# Altium PCB shield.PcbDoc
Units mm, origin at the board's own origin, x right, y up, seen from the top; angles counter-clockwise.
Board outline 78.89 x 114.25 mm, 2 copper layers (Top Layer, Bottom Layer); 72 components, 147 nets, 454 pads, 290 vias.
Unrouted connection lines stored in the file: 4.
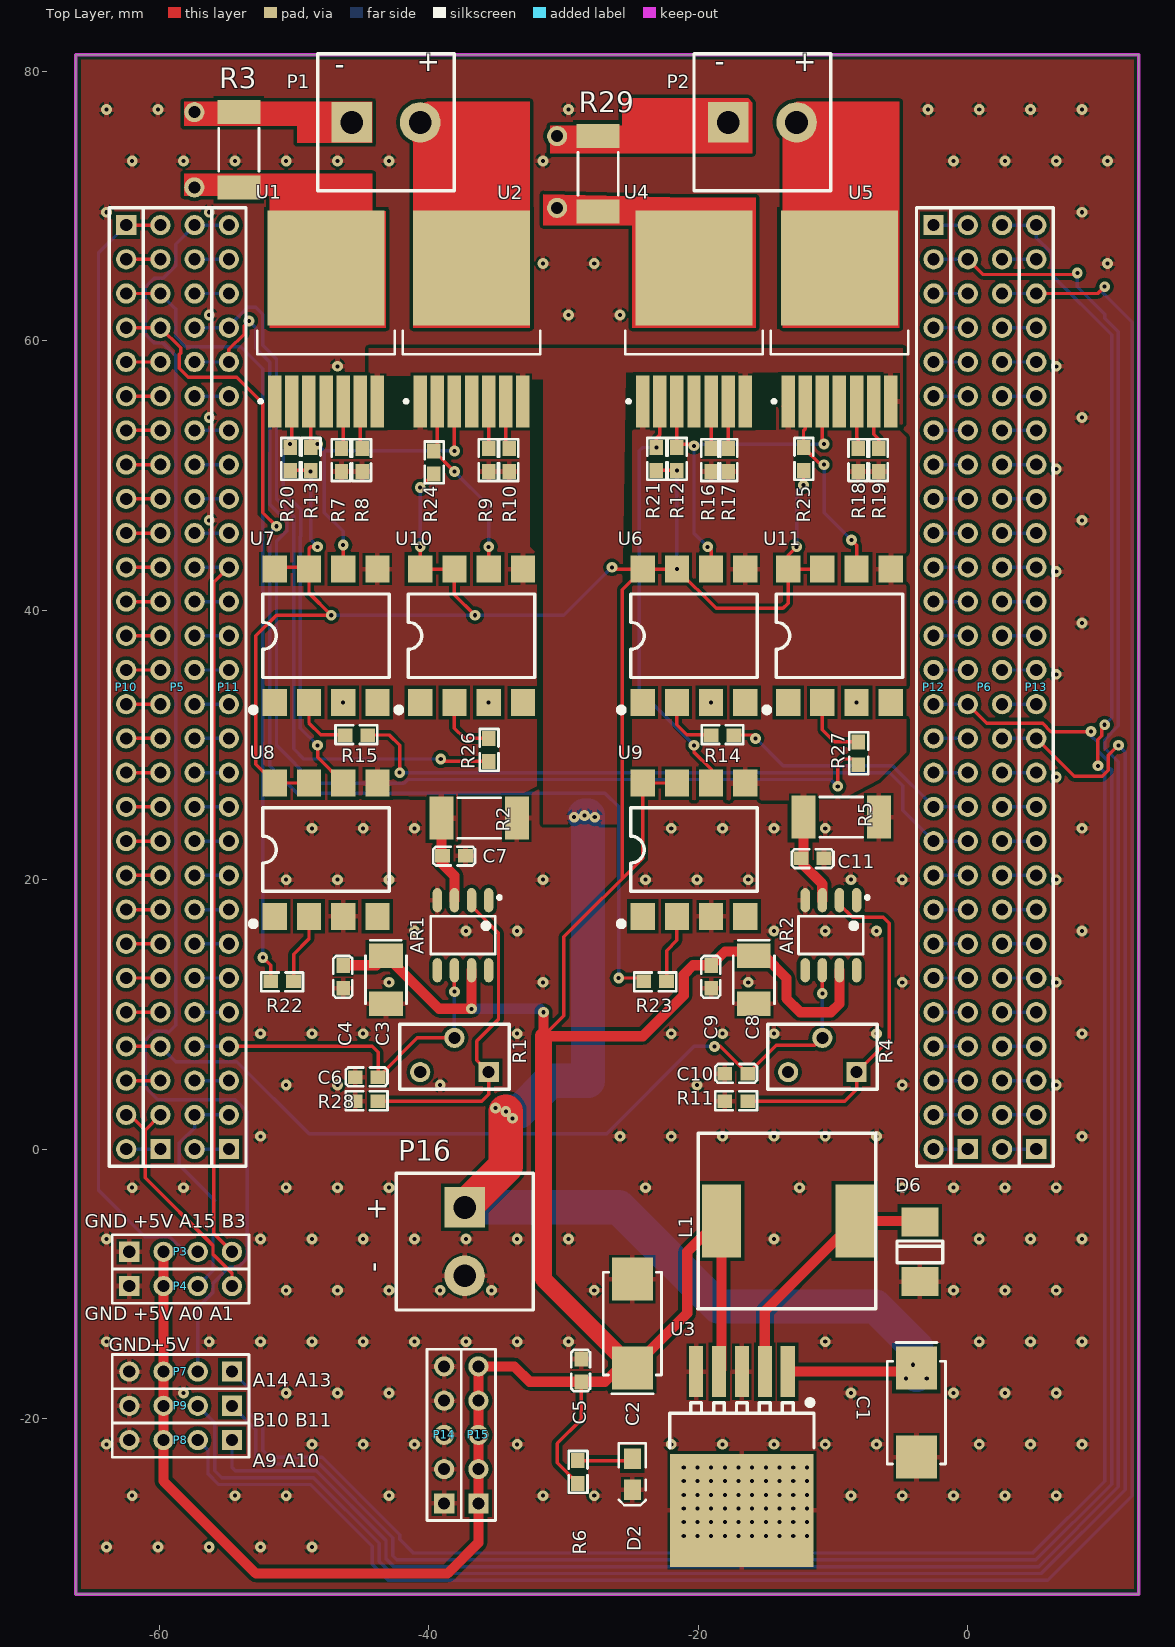
[diagram p0: Top Layer view]
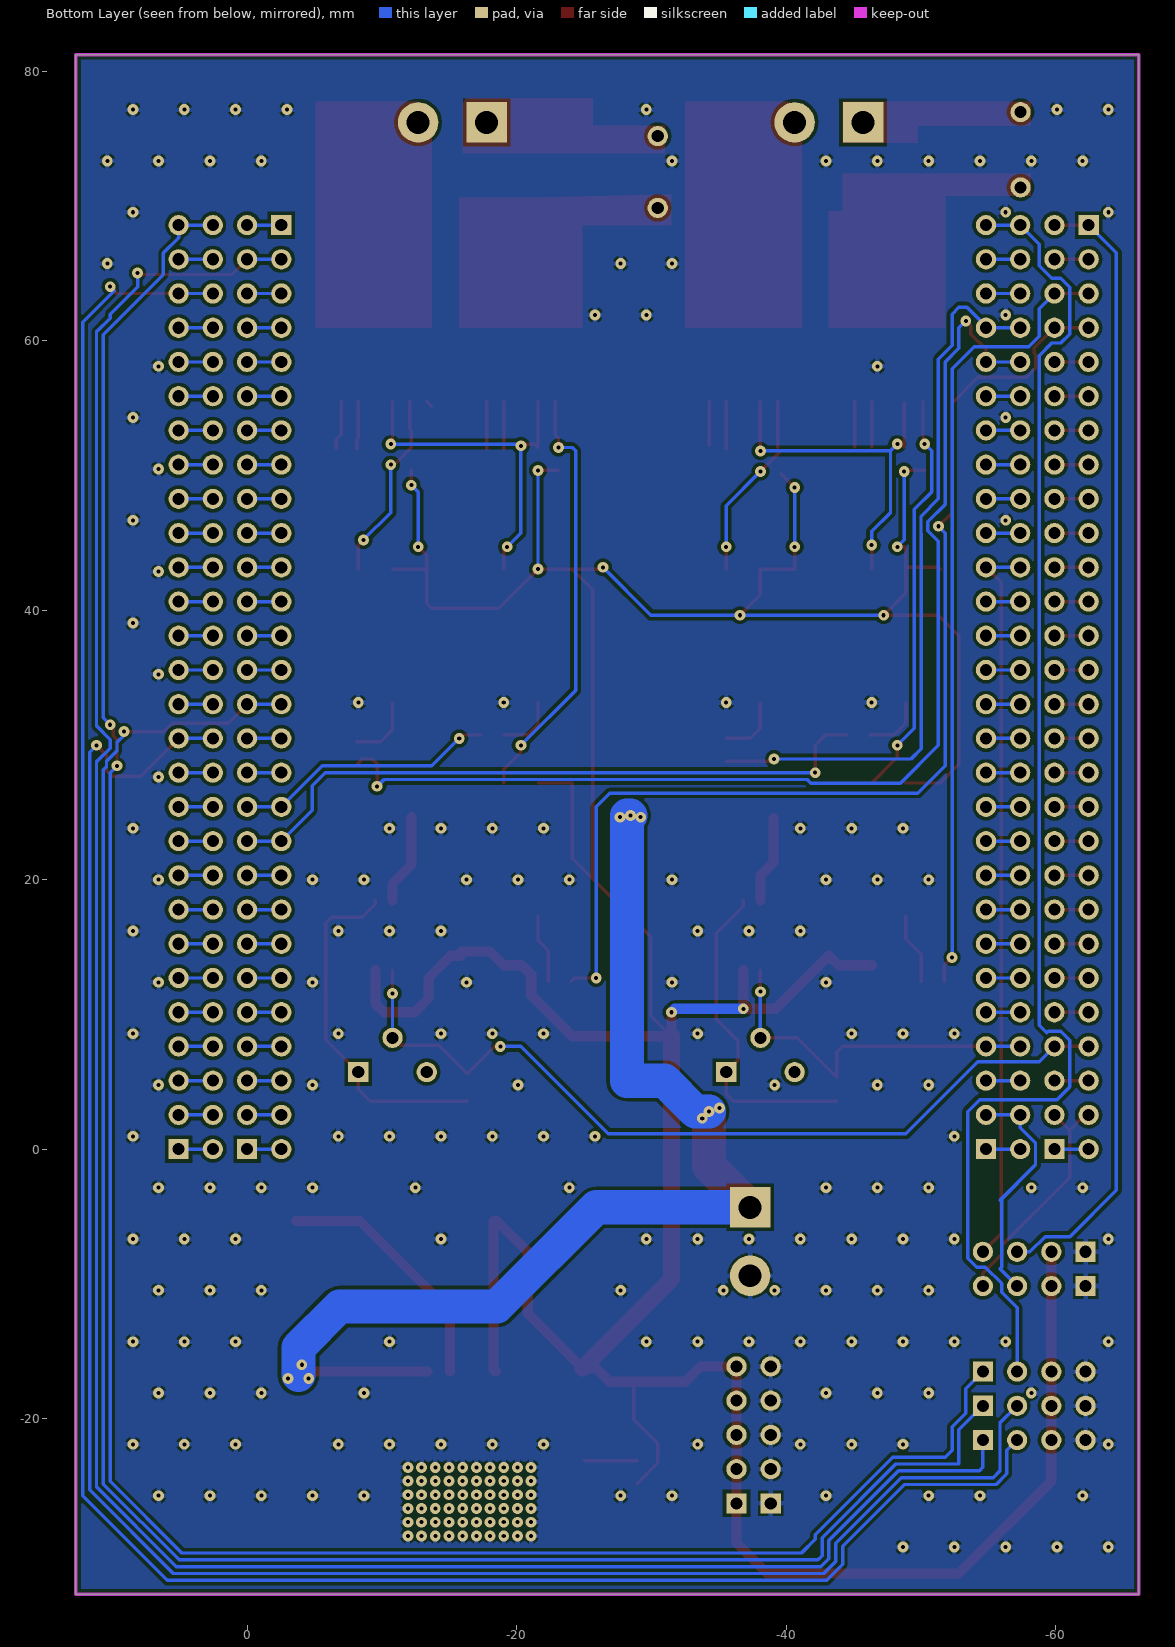
[diagram p1: Bottom Layer view, seen from below]

## Layer stack, top to bottom
Top Solder: solder mask 0.0102, Solder Resist, Dk 3.5
Top Layer: signal copper 0.0356
Dielectric 1: dielectric 0.32, FR-4, Dk 4.8
Bottom Layer: signal copper 0.0356
Bottom Solder: solder mask 0.0102, Solder Resist, Dk 3.5

## Board outline
-66.19,-33.02 12.7,-33.02 12.7,81.23 -66.19,81.23

## Design rules (kind name [scope] priority, off if disabled: settings)
Clearance [All] p1: gap=0.254
ComponentClearance [All] p1 off: gap=0.254 collisioncheckmode=3 verticalgap=0.254 showdistances=FALSE
HoleSize [All] p1: absolutevalues=TRUE maxlimit=10 minlimit=0.3 maxpercent=80.000 minpercent=20.000
MinimumSolderMaskSliver [All] p1 off: minsoldermaskwidth=0.254
PasteMaskExpansion [All] p1 off: expansion=0
PolygonConnect [All] p1: connectstyle=Relief reliefconductorwidth=0.381 reliefentries=4 polygonreliefangle="90 Angle" airgapwidth=0.178
RoutingVias [All] p1: holewidth=0.3 width=0.8 viastyle="Through Hole" minholewidth=0.3 minwidth=0.8 maxholewidth=5 maxwidth=5
SilkToSilkClearance [All] p1 off: silktosilkclearance=0.254
SilkToSolderMaskClearance [IsPad] p1 off: minsilkscreentomaskgap=0.254 clearancetoexposedcopper=TRUE
SolderMaskExpansion [All] p1 off: expansion=0.102
Width [All] p1: maxlimit=12.7 minlimit=0.254 preferedwidth=0.254
24 further rules are at their usual default settings.

## Components (designator, comment, footprint, x,y, rotation, side; value= is the part's Value field where it differs from the comment)
AR1 "OPAMP" LC-SO-8_3.9mm -37.465,15.875 r180 top
AR2 "OPAMP" LC-SO-8_3.9mm -10.16,15.875 r180 top
C1 "Cap" CAP-7343 -3.81,-19.558 r270 top
C2 "Cap" CAP-7343 -24.892,-12.954 r90 top
C3 "Cap Pol1" CAP-3528 -43.18,12.573 r270 top
C4 "Cap" CAP-0603 -46.355,11.938 r90 top
C5 "cap smd" CAP-0603 -28.702,-17.272 r90 top
C6 "Cap" CAP-0603 -45.466,5.334 r0 top
C7 "Cap" CAP-0603 -37.28,21.78 r180 top
C8 "Cap Pol1" CAP-3528 -15.875,12.573 r270 top
C9 "Cap" CAP-0603 -19.05,11.938 r90 top
C10 "Cap" CAP-0603 -18.034,5.588 r0 top
C11 "Cap" CAP-0603 -10.668,21.59 r180 top
D2 "LED2" D2012[0805] -24.892,-24.13 r270 top
D6 "SS34" LC-SMB(DO-214AA)_S3 -3.556,-7.62 r270 top
L1 "Inductor" Inductor1207 -8.382,-5.334 r180 top
P1 "2_Pins_Port" WJ2EDGV-5.08-2P -45.72,76.2 r0 top
P2 "2_Pins_Port" WJ2EDGV-5.08-2P -17.78,76.2 r0 top
P3 "Header 4" HDR1X4 -62.23,-7.62 r0 top
P4 "Header 4" HDR1X4 -62.23,-10.16 r0 top
P5 "Header28*2" HDR28*2 -59.92,0 r0 top locked
P6 "Header28*2" HDR28*2 0,0 r0 top locked
P7 "Header 4" HDR1X4 -54.61,-16.51 r180 top
P8 "Header 4" HDR1X4 -54.61,-21.59 r180 top
P9 "Header 4" HDR1X4 -54.61,-19.05 r180 top
P10 "Header28" HDR28 -62.46,68.58 r180 top
P11 "Header28" HDR28 -54.84,0 r0 top
P12 "Header28" HDR28 -2.54,68.58 r180 top
P13 "Header28" HDR28 5.08,0 r0 top
P14 "Header 5" HDR1X5 -38.862,-26.289 r90 top
P15 "Header 5" HDR1X5 -36.322,-26.289 r90 top
P16 "2_Pins_Port" WJ2EDGV-5.08-2P -37.338,-4.318 r270 top
R1 "Res Adj1" 3266W -35.56,5.715 r180 top
R2 "sampling" 6332[2512] -36.264,24.574 r180 top
R3 "sampling" 6332[2512] -54.102,74.168 r270 top
R4 "Res Adj1" 3266W -8.255,5.715 r180 top
R5 "sampling" 6332[2512] -9.398,24.638 r180 top
R6 "RES1" RES-0603 -28.956,-23.114 r270 top
R7 "10K" RES-0603 -46.482,50.292 r90 top
R8 "10K" RES-0603 -44.958,50.292 r90 top
R9 "10K" RES-0603 -35.56,50.292 r90 top
R10 "10K" RES-0603 -34.036,50.292 r90 top
R11 "Res1" RES-0603 -18.034,3.556 r0 top
R12 "Res1" RES-0603 -21.59,52.07 r270 top
R13 "Res1" RES-0603 -48.768,52.07 r270 top
R14 "Res1" RES-0603 -19.05,30.734 r0 top
R15 "Res1" RES-0603 -46.228,30.734 r0 top
R16 "10K" RES-0603 -19.05,50.292 r90 top
R17 "10K" RES-0603 -17.78,50.292 r90 top
R18 "10K" RES-0603 -8.128,50.292 r90 top
R19 "10K" RES-0603 -6.604,50.292 r90 top
R20 "Res1" RES-0603 -50.292,52.07 r270 top
R21 "Res1" RES-0603 -23.114,52.07 r270 top
R22 "Res1" RES-0603 -50.038,12.446 r180 top
R23 "Res1" RES-0603 -22.352,12.446 r180 top
R24 "Res1" RES-0603 -39.624,51.816 r270 top
R25 "Res1" RES-0603 -12.192,52.07 r270 top
R26 "Res1" RES-0603 -35.56,30.48 r270 top
R27 "Res1" RES-0603 -8.128,30.226 r270 top
R28 "Res1" RES-0603 -45.466,3.556 r0 top
R29 "sampling" 6332[2512] -27.432,72.39 r270 top
U1 "BTN7970" BTN7970 -47.625,61.595 r90 top
U2 "BTN7970" BTN7970 -36.83,61.595 r90 top
U3 "LM2596" LC-TO-263-5 -16.764,-16.51 r90 top
U4 "BTN7970" BTN7970 -20.32,61.595 r90 top
U5 "BTN7970" BTN7970 -9.525,61.595 r90 top
U6 "6n137" LC-SMD-8_6.3mm -20.32,38.1 r0 top
U7 "6n137" LC-SMD-8_6.3mm -47.625,38.1 r0 top
U8 "6n137" LC-SMD-8_6.3mm -47.625,22.225 r0 top
U9 "6n137" LC-SMD-8_6.3mm -20.32,22.225 r0 top
U10 "6n137" LC-SMD-8_6.3mm -36.83,38.1 r0 top
U11 "6n137" LC-SMD-8_6.3mm -9.525,38.1 r0 top

## Footprints (in the part's own frame and the unit in brackets; to place one, negate y for a bottom-side part, rotate by r counter-clockwise, add the part's x,y. Pads: shape width x height; smd on the part's side, far side on the other; paste and mask are expansions set on the pad)
3266W [mm]
  rect 1.5x1.5 hole 0.9: 1(0,0)
  round 1.5 hole 0.9: 2(2.54,-2.54) 3(5.08,0)
  silkscreen extent -1.52,-3.56 6.6,1.27
6332[2512] [mm] "Chip Resistor; Body 6.3 x 3.2 mm (LxW typ)"
  rect 1.8x3.2 smd: 1(-2.8,0) 2(2.8,0)
  silkscreen extent -1.6,-1.5 1.6,1.5
BTN7970 [mm] "D2-PAK, 8-Pads, Body 7.82x8.46mm (max), IPC Medium Density"
  rect 3.85x1 smd paste-0.1: 1(-6.1,3.81) 2(-6.1,2.54) 3(-6.1,1.27) 4(-6.1,0) 5(-6.1,-1.27) 6(-6.1,-2.54) 7(-6.1,-3.81)
  rect 8.5x8.7 smd paste-1: 4(3.8,0)
  silkscreen extent -6.22,-5.1 -0.85,5.1, body extent -2.6,-5.1 6.85,5.1, height 4.4
CAP-0603 [mm]
  rect 1.1x1 smd: 1(0,0) 2(1.7,0)
  silkscreen extent -0.71,-0.67 2.39,0.73
CAP-3528 [mm] "钽电容"
  rect 1.8x2.5 smd: 1(-1.778,0) 2(1.778,0)
  silkscreen extent -2.92,-1.52 1.78,1.52, body extent -1.91,-1.4 1.91,1.4, height 1.1
CAP-7343 [mm] "钽电容"
  rect 3.2x3.05 smd: 1(-3.302,0) 2(3.302,0)
  silkscreen extent -5.21,-2.16 3.81,2.16, body extent -3.68,-1.91 3.68,1.91, height 2.95
D2012[0805] [mil]
  rect 60x50 smd: 1(-45,0) 2(45,0)
  silkscreen extent -91,-39 91,39, body extent -39,-24 39,24, height 47
HDR1X4 [mm] "Connector; Header; 4 Position"
  rect 1.5x1.5 hole 0.9: 1(0,0)
  round 1.5 hole 0.9: 2(2.54,0) 3(5.08,0) 4(7.62,0)
  silkscreen extent -1.27,-1.27 8.89,1.27
HDR1X5 [mm] "Connector; Header; 5 Position"
  rect 1.5x1.5 hole 0.9: 1(0,0)
  round 1.5 hole 0.9: 2(2.54,0) 3(5.08,0) 4(7.62,0) 5(10.16,0)
  silkscreen extent -1.27,-1.27 11.43,1.27
HDR28 [mm]
  rect 1.5x1.5 hole 0.9: 1(0,0)
  round 1.5 hole 0.9: 2(0,2.54) 3(0,5.08) 4(0,7.62) 5(0,10.16) 6(0,12.7) 7(0,15.24) 8(0,17.78) 9(0,20.32) 10(0,22.86) 11(0,25.4) 12(0,27.94) 13(0,30.48) 14(0,33.02) 15(0,35.56) 16(0,38.1) 17(0,40.64) 18(0,43.18) 19(0,45.72) 20(0,48.26) 21(0,50.8) 22(0,53.34) 23(0,55.88) 24(0,58.42) 25(0,60.96) 26(0,63.5) 27(0,66.04) 28(0,68.58)
  silkscreen extent -1.27,-1.27 1.27,69.85
HDR28*2 [mm]
  rect 1.5x1.5 hole 0.9: 1(0,0)
  round 1.5 hole 0.9: 2(0,2.54) 3(0,5.08) 4(0,7.62) 5(0,10.16) 6(0,12.7) 7(0,15.24) 8(0,17.78) 9(0,20.32) 10(0,22.86) 11(0,25.4) 12(0,27.94) 13(0,30.48) 14(0,33.02) 15(0,35.56) 16(0,38.1) 17(0,40.64) 18(0,43.18) 19(0,45.72) 20(0,48.26) 21(0,50.8) 22(0,53.34) 23(0,55.88) 24(0,58.42) 25(0,60.96) 26(0,63.5) 27(0,66.04) 28(0,68.58) 29(2.54,68.58) 30(2.54,66.04) 31(2.54,63.5) 32(2.54,60.96) 33(2.54,58.42) 34(2.54,55.88) 35(2.54,53.34) 36(2.54,50.8) 37(2.54,48.26) 38(2.54,45.72) 39(2.54,43.18) 40(2.54,40.64) 41(2.54,38.1) 42(2.54,35.56) 43(2.54,33.02) 44(2.54,30.48) 45(2.54,27.94) 46(2.54,25.4) 47(2.54,22.86) 48(2.54,20.32) 49(2.54,17.78) 50(2.54,15.24) 51(2.54,12.7) 52(2.54,10.16) 53(2.54,7.62) 54(2.54,5.08) 55(2.54,2.54) 56(2.54,0)
  silkscreen extent -1.27,-1.27 3.81,69.85
Inductor1207 [mm] "Inductor1207"
  rect 2.9x5.4 smd: 1(0,0) 2(9.9,0)
  silkscreen extent -1.55,-6.5 11.66,6.5
LC-SMB(DO-214AA)_S3 [mm]
  rect 2.159x2.743 smd: 1(2.21,0) 2(-2.21,0)
  silkscreen extent -0.8,-1.7 0.8,1.7
LC-SMD-8_6.3mm [mm]
  rect 1.8x2 smd: 1(-3.81,-4.95) 2(-1.27,-4.95) 3(1.27,-4.95) 4(3.81,-4.95) 5(3.81,4.95) 6(1.27,4.95) 7(-1.27,4.95) 8(-3.81,4.95)
  silkscreen extent -5.6,-5.7 4.7,3.1
LC-SO-8_3.9mm [mm]
  oval 0.7x1.8 smd: 1(-1.905,-2.6) 2(-0.635,-2.6) 3(0.635,-2.6) 4(1.905,-2.6) 5(1.905,2.6) 6(0.635,2.6) 7(-0.635,2.6) 8(-1.905,2.6)
  silkscreen extent -2.83,-2.92 2.4,1.4
LC-TO-263-5 [mm]
  rect 8.4x10.65 smd: 0(-10.3,0)
  rect 3.8x1.05 smd: 1(0,-3.4) 2(0,-1.7) 3(0,0) 4(0,1.7) 5(0,3.4)
  silkscreen extent -5.65,-5.35 -2.1,5.35
RES-0603 [mm] "1/10W"
  rect 1.1x1 smd: 1(0,0) 2(1.7,0)
  silkscreen extent -0.71,-0.67 2.39,0.73
WJ2EDGV-5.08-2P [mm]
  rect 3x3 hole 1.7: 1(0,0)
  round 3 hole 1.7: 2(5.08,0)
  silkscreen extent -2.54,-5.08 7.62,5.08

## Part data
AR1 AR2: "Operational Amplifier"
C1 C2: library part "Cap Pol S", "贴片极性电容"
C3 C8: "Polarized Capacitor (Radial)"
C4 C6 C7 C9 C10 C11: "Capacitor"
C5: library part CAP, "贴片无极性电容"
D2: "Typical RED, GREEN, YELLOW, AMBER GaAs LED"
D6: library part "Diode 1N5400", "3 Amp General Purpose Rectifier"
P3 P4 P7 P8 P9: "Header, 4-Pin"
P5 P6: library part header28*2
P14 P15: "Header, 5-Pin"
R1 R4: "Variable Resistor"
R2 R3 R5 R29: library part Res3, "Resistor"
R7 R8 R9 R10 R16 R17 R18 R19: library part res1, "Resistor"
R11 R12 R13 R14 R15 R20 R21 R22 R23 R24 R25 R26 R27 R28: "Resistor"

## Free pads (board coordinates)
  round 1.5 hole 0.9 mask+0.04: 4(-57.404,76.962) 5(-57.404,71.374) 6(-30.48,75.184) 7(-30.48,69.85)

## Via types
v1: diameter 0.8, hole 0.3, Top Layer to Bottom Layer, 290 vias

## Nets (pads, with @x,y where several pads share a name; then routed paths per layer and width w, separated by ;. In a path a pad name is that pad's centre, name@x,y a point inside that pad or via, vN(x,y) a via of type N, cw(c..) or ccw(c..) an arc to the next point about the centre after c; other vN are vias at no path point)
A0: P4.3 P5.55 P11.2 | length 17.5
  Bottom Layer w0.254: P4.3 -55.88,-8.89 -56.019,-8.751 -56.019,-3.81 -55.88,-3.81 -58.511,-1.179 -58.511,0.468 -57.38,1.599 P5.55 P11.2
A1: P4.4 P5.2 P10.27 | length 17.7
  Top Layer w0.254: P10.27 -62.182,2.54 -61.051,1.409 ; P5.2 -61.051,1.409 ; P4.4 -54.61,-9.219 -56.019,-7.81 -56.019,-7.152 -61.051,-2.12 -61.051,1.409
A2: P5.56 P11.1 | length 2.5
  Bottom Layer w0.254: P5.56 P11.1
A3: P5.1 P10.28 | length 2.5
  Bottom Layer w0.254: P10.28 P5.1
A4: P6.1 P12.28 | length 2.5
  Bottom Layer w0.254: P12.28 P6.1
A5: P6.56 P13.1 | length 2.5
  Bottom Layer w0.254: P6.56 P13.1
A6: P6.2 P12.27 | length 2.5
  Bottom Layer w0.254: P12.27 P6.2
A7: P6.55 P13.2 | length 2.5
  Bottom Layer w0.254: P6.55 P13.2
A8: P6.26 P12.3 | length 2.5
  Bottom Layer w0.254: P12.3 P6.26
A9: P6.31 P8.2 P13.26 | length 176.7
  Top Layer w0.254: P13.26 9.652,63.5 v1(10.16,64.008)
  Bottom Layer w0.254: P8.2 -56.388,-22.352 -56.388,-24.086 -55.582,-24.892 -48.768,-24.892 -44.196,-29.464 -44.196,-30.814 -43.006,-32.004 5.922,-32.004 12.192,-25.734 12.192,61.381 9.862,63.71 v1(10.16,64.008) ; P6.31 P13.26
A10: P6.27 P8.1 P12.2 | length 177.5
  Top Layer w0.254: P6.27 1.131,64.909 8.013,64.909 v1(8.128,65.024)
  Bottom Layer w0.254: P8.1 -54.61,-23.622 -54.356,-23.876 -48.347,-23.876 -43.18,-29.043 -43.18,-30.393 -42.585,-30.988 5.254,-30.988 11.176,-25.066 11.176,28.747 10.16,29.763 10.16,30.391 11.176,31.407 11.176,60.662 10.16,61.678 10.16,61.976 8.128,64.008 v1(8.128,65.024) ; P12.2 P6.27
A11: P6.30 P13.27 | length 2.5
  Bottom Layer w0.254: P6.30 P13.27
A12: P6.28 P12.1 | length 2.5
  Bottom Layer w0.254: P12.1 P6.28
A13: P6.29 P7.1 P13.28 | length 173.5
  Top Layer w0.254: v1(9.652,28.448) 9.652,30.391 9.925,30.665 9.925,31.261 v1(10.16,31.496)
  Bottom Layer w0.254: P7.1 -53.34,-17.78 -53.34,-19.602 -52.324,-20.618 -52.324,-22.352 -51.816,-22.86 -47.926,-22.86 -42.164,-28.622 -42.164,-28.956 -41.148,-29.972 4.833,-29.972 10.16,-24.645 10.16,27.94 v1(9.652,28.448) ; P6.29 P13.28 5.08,67.639 6.211,66.508 6.211,64.909 10.668,60.452 10.668,32.004 v1(10.16,31.496)
A14: P5.29 P7.2 P11.28 | length 101
  Bottom Layer w0.254: P7.2 -57.15,-11.759 -56.019,-10.628 -56.019,-9.97 -54.8,-8.751 -54.142,-8.751 -53.479,-8.088 -53.479,2.778 -54.372,3.671 -60.11,3.671 -61.051,4.612 -61.051,8.088 -60.388,8.751 -59.452,8.751 -59.337,8.636 -58.789,9.184 -58.789,58.888 -59.73,59.829 -60.388,59.829 -61.051,60.492 -61.051,63.968 -60.388,64.631 -59.73,64.631 -58.789,65.572 -58.789,67.171 P5.29 P11.28
A15: P3.3 P5.28 P10.1 | length 84.3
  Top Layer w0.254: P10.1 P5.28
  Bottom Layer w0.254: P10.1 -64.516,66.524 -64.516,-3.048 -61.075,-6.489 -59.222,-6.489 -58.091,-7.62 P3.3
B0: P6.4 P12.25 | length 2.5
  Bottom Layer w0.254: P12.25 P6.4
B1: P6.53 P13.4 | length 2.5
  Bottom Layer w0.254: P6.53 P13.4
B2: P6.5 P12.24 | length 2.5
  Bottom Layer w0.254: P12.24 P6.5
B3: P3.4 P5.39 P11.18 | length 54.4
  Top Layer w0.254: P11.18 -54.864,43.18 -55.971,42.073 -55.971,-6.259 P3.4
  Bottom Layer w0.254: P5.39 P11.18
B4: P5.18 P10.11 | length 2.5
  Top Layer w0.254: P10.11 P5.18
B5: P5.40 P11.17 | length 2.5
  Bottom Layer w0.254: P5.40 P11.17
B6: P5.17 P10.12 | length 2.5
  Top Layer w0.254: P10.12 P5.17
B7: P5.41 P11.16 | length 2.5
  Bottom Layer w0.254: P5.41 P11.16
B8: P5.16 P10.13 | length 2.5
  Top Layer w0.254: P10.13 P5.16
B9: P5.42 P11.15 | length 2.5
  Bottom Layer w0.254: P5.42 P11.15
B10: P6.44 P9.2 P13.13 | length 146.3
  Top Layer w0.254: P13.13 7.893,27.667 9.975,27.667 10.433,28.125 10.433,29.229 v1(11.176,29.972)
  Bottom Layer w0.254: P9.2 -55.88,-20.32 -55.88,-23.876 -55.372,-24.384 -48.558,-24.384 -43.688,-29.254 -43.688,-30.603 -42.795,-31.496 5.464,-31.496 11.684,-25.276 11.684,29.464 v1(11.176,29.972) ; P6.44 P13.13
B11: P6.14 P9.1 P12.15 | length 143.6
  Top Layer w0.254: P6.14 1.409,31.611 5.548,31.611 6.171,30.988 v1(9.144,30.988)
  Bottom Layer w0.254: P9.1 -52.832,-20.828 -52.832,-23.368 -48.137,-23.368 -42.672,-28.833 -42.672,-30.182 -42.374,-30.48 5.044,-30.48 10.668,-24.856 10.668,28.15 10.433,28.385 10.433,28.771 9.652,29.553 9.652,30.182 9.144,30.69 v1(9.144,30.988) ; P12.15 P6.14
B12: P6.43 P13.14 | length 2.5
  Bottom Layer w0.254: P6.43 P13.14
B13: P6.15 P12.14 | length 2.5
  Bottom Layer w0.254: P12.14 P6.15
B14: P6.42 P13.15 | length 2.5
  Bottom Layer w0.254: P6.42 P13.15
B15: P6.16 P12.13 | length 2.5
  Bottom Layer w0.254: P12.13 P6.16
C0: AR1.6 C6.2 P5.53 P11.4 R1.2 | length 27.5
  Top Layer w0.254: P11.4 -44.196,7.62 -43.766,7.19 C6.2 -40.845,8.255 R1.2 ; v1(-38.1,11.684) AR1.6
  Bottom Layer w0.254: P5.53 P11.4 ; R1.2 v1(-38.1,11.684)
C1: AR2.6 C10.2 P5.4 P10.25 R4.2 | length 64
  Top Layer w0.254: P10.25 P5.4 ; v1(-18.796,7.62) -18.366,7.62 C10.2 -14.224,7.698 -11.352,7.698 R4.2 ; v1(-10.795,11.557) AR2.6
  Bottom Layer w0.254: P5.4 -58.789,6.489 -54.241,6.489 -48.895,1.143 -26.797,1.143 -20.32,7.62 v1(-18.796,7.62) ; R4.2 v1(-10.795,11.557)
C2: P5.54 P11.3 | length 2.5
  Bottom Layer w0.254: P5.54 P11.3
C3: P5.3 P10.26 | length 2.5
  Top Layer w0.254: P10.26 P5.3
C4: P6.3 P12.26 | length 2.5
  Bottom Layer w0.254: P12.26 P6.3
C5: P6.54 P13.3 | length 2.5
  Bottom Layer w0.254: P6.54 P13.3
C6: P6.24 P12.5 | length 2.5
  Bottom Layer w0.254: P12.5 P6.24
C7: P6.33 P13.24 | length 2.5
  Bottom Layer w0.254: P6.33 P13.24
C8: P6.25 P12.4 | length 2.5
  Bottom Layer w0.254: P12.4 P6.25
C9: P6.32 P13.25 | length 2.5
  Bottom Layer w0.254: P6.32 P13.25
C10: P5.30 P11.27 | length 2.5
  Bottom Layer w0.254: P5.30 P11.27
C11: P5.27 P10.2 | length 2.5
  Top Layer w0.254: P10.2 P5.27
C12: P5.31 P11.26 | length 2.5
  Bottom Layer w0.254: P5.31 P11.26
C13: P5.46 P11.11 | length 2.5
  Bottom Layer w0.254: P5.46 P11.11
C14: P5.11 P10.18 | length 2.5
  Top Layer w0.254: P10.18 P5.11
C15: P5.47 P11.10 | length 2.5
  Bottom Layer w0.254: P5.47 P11.10
D0: P5.26 P10.3 R22.2 | length 59.4
  Top Layer w0.254: P10.3 P5.26 ; v1(-52.324,14.224) -51.738,13.638 R22.2
  Bottom Layer w0.254: P5.26 -58.916,62.496 -58.789,62.369 -58.789,60.313 -58.027,59.551 -53.963,59.551 -52.324,57.912 v1(-52.324,14.224)
D1: P5.32 P11.25 R26.2 | length 53.8
  Top Layer w0.254: P11.25 P11.25@-54.84,61.073 ; v1@-38.94,28.78 R26.2
  Bottom Layer w0.254: P5.32 P11.25 ; P11.25@-54.84,61.073 -53.429,62.484 -52.832,62.484 -52.324,61.976 -52.324,59.646 -51.308,58.63 -51.308,48.26 -50.019,46.971 -50.019,45.694 -50.038,45.675 -50.038,29.718 -49.276,28.956 v1(-39.116,28.956)
D2: P5.25 P10.4 R23.2 | length 82.8
  Top Layer w0.254: P10.4 P5.25 -58.42,59.46 -58.42,59.07 -58.511,58.979 -58.511,57.952 -57.848,57.289 -54.241,57.289 -52.324,55.372 -52.324,47.244 v1(-51.308,46.228) ; v1(-25.908,12.7) -24.306,12.7 R23.2
  Bottom Layer w0.254: v1(-51.308,46.228) -51.816,45.72 -51.816,28.448 -49.784,26.416 -26.924,26.416 -25.908,25.4 v1(-25.908,12.7)
D3: P5.33 P11.24 R27.2 | length 85.9
  Top Layer w0.254: P11.24 -54.84,59.361 -53.709,60.492 -53.709,61.099 v1(-53.34,61.468) ; v1(-9.652,26.924) -9.652,28.604 -9.3,28.956 -8.558,28.956 R27.2
  Bottom Layer w0.254: P5.33 P11.24 ; v1(-53.34,61.468) -52.832,60.96 -52.832,59.436 -51.816,58.42 -51.816,47.841 -50.527,46.551 -50.527,45.905 -51.308,45.123 -51.308,29.972 -48.495,27.159 -41.841,27.159 -41.567,27.432 -10.16,27.432 v1(-9.652,26.924)
D4: P5.24 P10.5 | length 2.5
  Top Layer w0.254: P10.5 P5.24
D5: P5.34 P11.23 | length 2.5
  Bottom Layer w0.254: P5.34 P11.23
D6: P5.23 P10.6 | length 2.5
  Top Layer w0.254: P10.6 P5.23
D7: P5.35 P11.22 | length 2.5
  Bottom Layer w0.254: P5.35 P11.22
D8: P6.41 P13.16 | length 2.5
  Bottom Layer w0.254: P6.41 P13.16
D9: P6.17 P12.12 | length 2.5
  Bottom Layer w0.254: P12.12 P6.17
D10: P6.40 P13.17 | length 2.5
  Bottom Layer w0.254: P6.40 P13.17
D11: P6.18 P12.11 | length 2.5
  Bottom Layer w0.254: P12.11 P6.18
D12: P6.39 P13.18 | length 2.5
  Bottom Layer w0.254: P6.39 P13.18
D13: P6.19 P12.10 | length 2.5
  Bottom Layer w0.254: P12.10 P6.19
D14: P6.38 P13.19 | length 2.5
  Bottom Layer w0.254: P6.38 P13.19
D15: P6.20 P12.9 | length 2.5
  Bottom Layer w0.254: P12.9 P6.20
E0: P5.15 P10.14 | length 2.5
  Top Layer w0.254: P10.14 P5.15
E1: P5.43 P11.14 | length 2.5
  Bottom Layer w0.254: P5.43 P11.14
E2: P5.14 P10.15 | length 2.5
  Top Layer w0.254: P10.15 P5.14
E3: P5.44 P11.13 | length 2.5
  Bottom Layer w0.254: P5.44 P11.13
E4: P5.13 P10.16 | length 2.5
  Top Layer w0.254: P10.16 P5.13
E5: P5.45 P11.12 | length 2.5
  Bottom Layer w0.254: P5.45 P11.12
E6: P5.12 P10.17 | length 2.5
  Top Layer w0.254: P10.17 P5.12
E7: P6.9 P12.20 | length 2.5
  Bottom Layer w0.254: P12.20 P6.9
E8: P6.48 P13.9 | length 2.5
  Bottom Layer w0.254: P6.48 P13.9
E9: P6.10 P12.19 R15.2 | length 50
  Top Layer w0.254: R15.2 -42.926,30.734 -42.164,29.972 v1(-42.164,27.94)
  Bottom Layer w0.254: v1(-42.164,27.94) -5.798,27.94 -4.822,26.964 -4.822,25.142 P12.19 P6.10
E10: P6.47 P13.10 | length 2.5
  Bottom Layer w0.254: P6.47 P13.10
E11: P6.11 P12.18 R14.2 | length 19.6
  Top Layer w0.254: R14.2 -16.002,30.734 v1(-15.748,30.48)
  Bottom Layer w0.254: v1(-15.748,30.48) -13.716,28.448 -5.588,28.448 P12.18 P6.11
E12: P6.46 P13.11 | length 2.5
  Bottom Layer w0.254: P6.46 P13.11
E13: P6.12 P12.17 | length 2.5
  Bottom Layer w0.254: P12.17 P6.12
E14: P6.45 P13.12 | length 2.5
  Bottom Layer w0.254: P6.45 P13.12
E15: P6.13 P12.16 | length 2.5
  Bottom Layer w0.254: P12.16 P6.13
F0: P5.10 P10.19 | length 2.5
  Top Layer w0.254: P10.19 P5.10
F1: P5.48 P11.9 | length 2.5
  Bottom Layer w0.254: P5.48 P11.9
F2: P5.9 P10.20 | length 2.5
  Top Layer w0.254: P10.20 P5.9
F3: P5.49 P11.8 | length 2.5
  Bottom Layer w0.254: P5.49 P11.8
F4: P5.8 P10.21 | length 2.5
  Top Layer w0.254: P10.21 P5.8
F5: P5.50 P11.7 | length 2.5
  Bottom Layer w0.254: P5.50 P11.7
F6: P5.7 P10.22 | length 2.5
  Top Layer w0.254: P10.22 P5.7
F7: P5.51 P11.6 | length 2.5
  Bottom Layer w0.254: P5.51 P11.6
F8: P5.6 P10.23 | length 2.5
  Top Layer w0.254: P10.23 P5.6
F9: P5.52 P11.5 | length 2.5
  Bottom Layer w0.254: P5.52 P11.5
F10: P5.5 P10.24 | length 2.5
  Top Layer w0.254: P10.24 P5.5
F11: P6.52 P13.5 | length 2.5
  Bottom Layer w0.254: P6.52 P13.5
F12: P6.6 P12.23 | length 2.5
  Bottom Layer w0.254: P12.23 P6.6
F13: P6.51 P13.6 | length 2.5
  Bottom Layer w0.254: P6.51 P13.6
F14: P6.7 P12.22 | length 2.5
  Bottom Layer w0.254: P12.22 P6.7
F15: P6.50 P13.7 | length 2.5
  Bottom Layer w0.254: P6.50 P13.7
G0: P6.8 P12.21 | length 2.5
  Bottom Layer w0.254: P12.21 P6.8
G1: P6.49 P13.8 | length 2.5
  Bottom Layer w0.254: P6.49 P13.8
G2: P6.37 P13.20 | length 2.5
  Bottom Layer w0.254: P6.37 P13.20
G3: P6.21 P12.8 | length 2.5
  Bottom Layer w0.254: P12.8 P6.21
G4: P6.36 P13.21 | length 2.5
  Bottom Layer w0.254: P6.36 P13.21
G5: P6.22 P12.7 | length 2.5
  Bottom Layer w0.254: P12.7 P6.22
G6: P6.35 P13.22 | length 2.5
  Bottom Layer w0.254: P6.35 P13.22
G7: P6.23 P12.6 | length 2.5
  Bottom Layer w0.254: P12.6 P6.23
G8: P6.34 P13.23 | length 2.5
  Bottom Layer w0.254: P6.34 P13.23
G9: P5.22 P10.7 | length 2.5
  Top Layer w0.254: P10.7 P5.22
G10: P5.36 P11.21 | length 2.5
  Bottom Layer w0.254: P5.36 P11.21
G11: P5.21 P10.8 | length 2.5
  Top Layer w0.254: P10.8 P5.21
G12: P5.37 P11.20 | length 2.5
  Bottom Layer w0.254: P5.37 P11.20
G13: P5.20 P10.9 | length 2.5
  Top Layer w0.254: P10.9 P5.20
G14: P5.38 P11.19 | length 2.5
  Bottom Layer w0.254: P5.38 P11.19
G15: P5.19 P10.10 | length 2.5
  Top Layer w0.254: P10.10 P5.19
GND: AR1.4 AR2.4 C1.2 C2.2 C3.2 C4.1 C5.2 C6.1 C7.1 C8.2 C9.1 C10.1 C11.1 D2.2 D6.1 P3.1 P4.1 P7.4 P8.4 P9.4 P14.1 P14.2 P14.3 P14.4 P14.5 P16.2 R2.1 R5.1 R11.1 R28.1 U3.0 U3.3 U3.5 U6.3 U7.3 U8.3 U9.3 U10.3 U11.3
  other v1: -63.92,-29.53 -60.11,-29.53 -56.3,-29.53 -52.49,-29.53 -48.68,-29.53 -21.082,-28.702 -20.066,-28.702 -19.05,-28.702 -18.034,-28.702 -17.018,-28.702 -16.002,-28.702 -14.986,-28.702 -13.97,-28.702 -12.954,-28.702 -11.938,-28.702 -21.082,-27.686 -20.066,-27.686 -19.05,-27.686 -18.034,-27.686 -17.018,-27.686 -16.002,-27.686 -14.986,-27.686 -13.97,-27.686 -12.954,-27.686 -11.938,-27.686 -21.082,-26.67 -20.066,-26.67 -19.05,-26.67 -18.034,-26.67 -17.018,-26.67 -16.002,-26.67 -14.986,-26.67 -13.97,-26.67 -12.954,-26.67 -11.938,-26.67 -62.015,-25.72 -54.395,-25.72 -50.585,-25.72 -42.965,-25.72 -31.535,-25.72 -27.725,-25.72 -8.675,-25.72 -4.865,-25.72 -1.055,-25.72 2.755,-25.72 6.565,-25.72 -21.082,-25.654 -20.066,-25.654 -19.05,-25.654 -18.034,-25.654 -17.018,-25.654 -16.002,-25.654 -14.986,-25.654 -13.97,-25.654 -12.954,-25.654 -11.938,-25.654 -21.082,-24.638 -20.066,-24.638 -19.05,-24.638 -18.034,-24.638 -17.018,-24.638 -16.002,-24.638 -14.986,-24.638 -13.97,-24.638 -12.954,-24.638 -11.938,-24.638 -21.082,-23.622 -20.066,-23.622 -19.05,-23.622 -18.034,-23.622 -17.018,-23.622 -16.002,-23.622 -14.986,-23.622 -13.97,-23.622 -12.954,-23.622 -11.938,-23.622 -63.92,-21.91 -48.68,-21.91 -44.87,-21.91 -41.06,-21.91 -33.44,-21.91 -22.01,-21.91 -18.2,-21.91 -14.39,-21.91 -10.58,-21.91 -6.77,-21.91 0.85,-21.91 4.66,-21.91 8.47,-21.91 -58.205,-18.1 -50.585,-18.1 -46.775,-18.1 -42.965,-18.1 -8.675,-18.1 -1.055,-18.1 2.755,-18.1 6.565,-18.1 -63.92,-14.29 -56.3,-14.29 -52.49,-14.29 -48.68,-14.29 -44.87,-14.29 -41.06,-14.29 -37.25,-14.29 -33.44,-14.29 -29.63,-14.29 -10.58,-14.29 0.85,-14.29 4.66,-14.29 8.47,-14.29 -50.585,-10.48 -46.775,-10.48 -42.965,-10.48 -39.155,-10.48 -35.345,-10.48 -27.725,-10.48 -1.055,-10.48 2.755,-10.48 6.565,-10.48 -63.92,-6.67 -52.49,-6.67 -48.68,-6.67 -44.87,-6.67 -41.06,-6.67 -37.25,-6.67 -33.44,-6.67 -29.63,-6.67 -14.39,-6.67 0.85,-6.67 4.66,-6.67 8.47,-6.67 -62.015,-2.86 -58.205,-2.86 -50.585,-2.86 -46.775,-2.86 -42.965,-2.86 -23.915,-2.86 -12.485,-2.86 -4.865,-2.86 -1.055,-2.86 2.755,-2.86 6.565,-2.86 -52.49,0.95 -25.82,0.95 -22.01,0.95 -18.2,0.95 -14.39,0.95 -10.58,0.95 -6.77,0.95 8.47,0.95 -50.585,4.76 -46.775,4.76 -39.155,4.76 -20.105,4.76 -4.865,4.76 6.565,4.76 -52.49,8.57 -48.68,8.57 -44.87,8.57 -33.44,8.57 -22.01,8.57 -18.2,8.57 -14.39,8.57 -6.77,8.57 8.47,8.57 -42.965,12.38 -31.535,12.38 -16.295,12.38 -4.865,12.38 6.565,12.38 -41.06,16.19 -37.25,16.19 -33.44,16.19 -14.39,16.19 -10.58,16.19 -6.77,16.19 8.47,16.19 -50.585,20 -46.775,20 -42.965,20 -31.535,20 -23.915,20 -20.105,20 -16.295,20 -8.675,20 -4.865,20 6.565,20 -48.68,23.81 -44.87,23.81 -41.06,23.81 -22.01,23.81 -18.2,23.81 -14.39,23.81 -10.58,23.81 8.47,23.81 6.565,27.62 -46.355,33.15 -35.56,33.15 -19.05,33.15 -8.255,33.15 6.565,35.24 8.47,39.05 6.565,42.86 -56.3,46.67 8.47,46.67 6.565,50.48 -56.3,54.29 8.47,54.29 -46.775,58.1 6.565,58.1 -56.3,61.91 -29.63,61.91 -25.82,61.91 -31.535,65.72 -27.725,65.72 10.375,65.72 -63.92,69.53 -56.3,69.53 8.47,69.53 -62.015,73.34 -58.205,73.34 -54.395,73.34 -50.585,73.34 -46.775,73.34 -42.965,73.34 -31.535,73.34 -1.055,73.34 2.755,73.34 6.565,73.34 10.375,73.34 -63.92,77.15 -60.11,77.15 -29.63,77.15 -2.96,77.15 0.85,77.15 4.66,77.15 8.47,77.15
MOTOR1+: P1.2 U2.4
MOTOR1-: pad.5 R3.2 U1.4
MOTOR1_A: R20.1 U1.2 U8.6 | length 30.4
  Top Layer w0.254: R20.1@-50.165,52.324 U1.2 ; v1(-48.26,29.972) -48.26,29.08 U8.6
  Bottom Layer w0.254: v1(-50.292,52.324) -50.8,51.816 -50.8,48.768 -49.511,47.479 -49.511,45.484 -49.53,45.465 -49.53,31.242 v1(-48.26,29.972)
MOTOR1_B: R24.1 U2.2 U10.6 | length 13.9
  Top Layer w0.254: R24.1 v1(-38.1,50.292) ; R24.1@-39.37,52.07 U2.2 ; U10.6 v1(-35.56,44.704)
  Bottom Layer w0.254: v1(-38.1,50.292) -35.56,47.752 v1(-35.56,44.704)
MOTOR1_EN: R13.1 U1.3 U2.3 U7.6 | length 26.7
  Top Layer w0.254: R13.1 U1.3@-48.768,55.368 ; U7.6 v1(-46.355,44.831) ; v1(-38.1,51.816) U2.3
  Bottom Layer w0.254: v1(-48.26,52.324) -47.752,51.816 ; v1(-46.355,44.831) -46.355,45.847 -47.752,47.244 -47.752,51.816 ; v1(-38.1,51.816) -47.752,51.816
MOTOR1_SAMPLE: AR1.3 C7.2 R2.2 R7.1 R8.1 R9.1 R10.1 U1.1 U2.1 U7.5 U8.5 U10.5 | length 6.5
  Top Layer w0.762: R2.2 -39.064,21.251 -38.1,20.286 AR1.3
MOTOR2+: P2.2 U5.4
MOTOR2-: pad.7 R29.2 U4.4
MOTOR2_A: R21.1 U4.2 U9.6 | length 32.1
  Top Layer w0.254: R21.1@-23.368,52.324 v1(-23.114,52.07) -23.114,52.747 -22.86,53.001 U4.2 ; v1(-20.32,29.972) -20.32,29.464 -19.05,28.194 U9.6
  Bottom Layer w0.254: v1(-23.114,52.07) -24.13,52.07 -24.384,51.816 -24.384,34.036 v1(-20.32,29.972)
MOTOR2_B: R25.1 U5.2 U11.6 | length 14.3
  Top Layer w0.254: U5.2 -12.065,53.443 -12.192,53.316 R25.1 -10.922,50.8 v1(-10.668,50.8) ; v1(-8.636,45.212) -8.255,44.831 U11.6
  Bottom Layer w0.254: v1(-10.668,50.8) -10.668,47.244 v1(-8.636,45.212)
MOTOR2_EN: R12.1 U4.3 U5.3 U6.6 | length 27.3
  Top Layer w0.254: R12.1 -21.336,52.324 -20.32,52.324 v1(-20.32,52.197) ; R12.1@-21.59,52.324 U4.3 ; v1(-19.304,44.704) -19.05,44.45 U6.6 ; U5.3 -10.795,52.451 v1(-10.668,52.324)
  Bottom Layer w0.254: v1(-19.304,44.704) -20.32,45.72 v1(-20.32,52.197) -20.32,52.324 v1(-10.668,52.324)
MOTOR2_SAMPLE: AR2.3 C11.2 R5.2 R16.1 R17.1 R18.1 R19.1 U4.1 U5.1 U6.5 U9.5 U11.5 | length 7.3
  Top Layer w0.254: U5.1@-13.716,55.114 U5.1
  Top Layer w0.762: R5.2 -12.198,21.088 -10.795,19.685 AR2.3
NetAR1_1: AR1.2 R1.1 R28.2 | length 24.7
  Top Layer w0.254: R28.2 -36.068,3.556 -35.56,4.064 R1.1 -36.437,6.592 -36.437,8.025 -34.829,9.633 -34.829,16.033 -36.83,18.034 AR1.2
NetAR2_1: AR2.2 R4.1 R11.2 | length 26.3
  Top Layer w0.254: R11.2 -9.144,3.556 -8.255,4.445 R4.1 -5.842,8.128 -5.842,16.764 -6.272,17.194 -8.558,17.194 -9.525,18.161 AR2.2
NetD2_1: D2.1 R6.1 | length 3.9
  Top Layer w0.254: R6.1 D2.1@-25.019,-23.114
NetD6_2: D6.2 L1.1 U3.2 | length 18.7
  Top Layer w0.762: U3.2 -15.064,-12.016 L1.1 D6.2@-3.632,-5.334
NetP1_1: P1.1 pad.4 R3.1
NetP2_1: P2.1 pad.6 R29.1
NetR7_2: R7.2 U1.5 | length 3.4
  Top Layer w0.254: R7.2@-46.355,52.119 U1.5
NetR8_2: R8.2 U1.6 | length 3.4
  Top Layer w0.254: R8.2@-45.085,52.119 U1.6
NetR9_2: R9.2 U2.5 | length 3.5
  Top Layer w0.254: R9.2 U2.5
NetR10_2: R10.2 U2.6 | length 3.2
  Top Layer w0.254: R10.2@-34.29,52.246 U2.6
NetR14_1: R14.1 U6.2 | length 4.5
  Top Layer w0.254: U6.2 -21.59,31.496 -20.847,30.753 -19.069,30.753 R14.1
NetR15_1: R15.1 U7.2 | length 4.6
  Top Layer w0.254: U7.2 -48.895,31.623 -48.025,30.753 -46.247,30.753 R15.1
NetR16_2: R16.2 U4.5 | length 3.5
  Top Layer w0.254: R16.2 U4.5
NetR17_2: R17.2 U4.6 | length 3.5
  Top Layer w0.254: R17.2 U4.6
NetR18_2: R18.2 U5.5 | length 3.6
  Top Layer w0.254: U5.5 -8.255,52.796 -8.128,52.669 R18.2
NetR19_2: R19.2 U5.6 | length 3.7
  Top Layer w0.254: U5.6 -6.985,53.05 -6.604,52.669 R19.2
NetR22_1: R22.1 U8.2 | length 5.3
  Top Layer w0.254: R22.1 -50.038,14.478 -48.895,15.621 U8.2
NetR23_1: R23.1 U9.2 | length 5.1
  Top Layer w0.254: R23.1 -22.352,14.732 -21.59,15.494 U9.2
NetR26_1: R26.1 U10.2 | length 4.8
  Top Layer w0.254: U10.2 -38.1,31.242 -37.338,30.48 R26.1
NetR27_1: R27.1 U11.2 | length 5.1
  Top Layer w0.254: U11.2 -10.795,31.115 -9.906,30.226 R27.1
VCC-5: AR1.7 AR2.7 C2.1 C3.1 C4.2 C5.1 C8.1 C9.2 L1.2 P3.2 P4.2 P7.3 P8.3 P9.3 P15.1 P15.2 P15.3 P15.4 P15.5 R6.2 R12.2 R13.2 R20.2 R21.2 R24.2 R25.2 U3.4 U6.7 U6.8 U7.7 U7.8 U8.7 U8.8 U9.7 U9.8 U10.7 U10.8 U11.7 U11.8 | length 340.5
  Top Layer w0.254: U7.8 -51.308,43.177 U7.7@-48.895,43.177 ; R20.2 R13.2 ; U8.7 U8.8 -52.832,28.572 -52.832,38.1 -51.308,39.624 v1(-47.244,39.624) -48.895,41.275 U7.7 U7.7@-48.895,43.177 ; v1(-48.26,44.704) -48.768,44.704 -48.895,44.577 U7.7@-48.895,43.177 ; v1(-40.64,44.704) U10.8 U10.7 -38.1,41.148 v1(-36.576,39.624) ; v1(-40.64,49.1) R24.2 ; -31.496,8.382 -29.972,9.906 -29.972,15.748 -24.13,21.59 U9.8 U9.7 ; R6.2 -30.48,-23.29 -30.48,-21.844 -28.702,-20.066 C5.1 ; v1@-26.546,43.05 U6.8 ; -25.654,20.066 -25.654,41.526 U6.8 ; R21.2 v1(-21.59,50.37) ; v1(-12.7,44.704) -13.335,44.069 U11.8 ; v1(-12.192,49.276) R25.2 ; U11.7 U11.8 ; U6.8 v1(-21.59,43.05) -18.672,40.132 -13.716,40.132 -13.335,40.513 U11.8
  Top Layer w0.762: P3.2 P4.2 P7.3 P9.3 P8.3 -59.69,-24.638 -52.832,-31.496 -38.608,-31.496 -36.322,-29.21 P15.1 P15.2 P15.3 P15.4 P15.5 -33.655,-16.129 -32.512,-17.272 C5.1 -26.924,-17.272 -25.908,-16.256 C2.1 -20.828,-12.192 -20.828,-7.62 -18.542,-5.334 L1.2 -18.282,-16.328 U3.4 ; C4.2 -43.893,13.638 C3.1 -39.243,10.414 v1(-36.83,10.414) AR1.7 ; v1(-31.496,10.16) -31.496,8.382 -24.13,8.382 -21.082,11.43 -21.082,12.954 -20.398,13.638 C9.2 -18.023,14.665 C8.1@-15.875,14.665 ; C8.1 -15.113,14.351 -13.462,12.7 -13.462,11.176 -12.446,10.16 -10.16,10.16 -9.525,10.795 AR2.7
  Top Layer w1.27: -31.496,8.382 -31.496,-9.652 C2.1
  Bottom Layer w0.254: v1(-48.768,50.292) -48.768,45.212 v1(-48.26,44.704) ; v1(-47.244,39.624) v1(-36.576,39.624) -29.972,39.624 v1(-26.416,43.18) ; v1(-40.64,44.704) v1(-40.64,49.1) ; v1(-21.59,43.05) v1(-21.59,50.37) ; v1(-12.7,44.704) -12.7,48.768 v1(-12.192,49.276)
  Bottom Layer w0.762: v1(-36.83,10.414) -31.75,10.414 v1(-31.496,10.16)
VCC-12: C1.1 P16.1 U1.7 U2.7 U3.1 U4.7 U5.7 | length 84.9
  Top Layer w0.762: U3.1 -4.064,-16.51 C1.1
  Top Layer w2.54: P16.1 -34.29,-1.27 v1(-34.29,2.794)
  Bottom Layer w2.54: P16.1 -25.908,-4.318 -18.542,-11.684 -6.858,-11.684 -3.81,-14.732 -3.81,-16.764 ; v1(-34.29,2.794) -33.274,2.794 -30.988,5.08 -28.194,5.08 -28.194,24.765 v1(-28.448,24.765)
  other v1: -4.572,-17.018 -3.048,-17.018 -4.064,-16.002 -33.782,2.286 -35.052,3.048 -29.21,24.638 -27.686,24.638
pads on no net: AR1.1 AR1.5 AR1.8 AR2.1 AR2.5 AR2.8 R1.3 R4.3 U6.1 U6.4 U7.1 U7.4 U8.1 U8.4 U9.1 U9.4 U10.1 U10.4 U11.1 U11.4

## Polygon pours and split planes (outlines as drawn)
GND on Top Layer "GND" (solid, remove dead copper, pour order 20): -66.04,-33.02 -65.786,-32.766 12.7,-32.766 12.7,81.026 12.496,81.23 -66.04,81.23 -66.04,79.652 -66.19,79.502
MOTOR2_SAMPLE on Top Layer "Motor2_GND" (solid, remove dead copper, pour order 6): -24.892,57.404 -24.892,53.34 -24.892,25.908 -13.208,25.908 -13.208,25.4 -13.208,22.86 -11.176,22.86 -11.176,26.216 -8.89,26.216 -6.604,27.432 -4.572,29.464 -4.572,52.832 -5.08,53.34 -12.7,53.34 -12.7,57.404 -14.224,57.404 -14.224,53.34 -14.732,53.34 -23.368,53.34 -23.368,57.404
MOTOR1_SAMPLE on Top Layer "Motor1_GND" (solid, remove dead copper, pour order 4): -51.816,57.404 -50.8,57.404 -50.8,53.34 -41.148,53.34 -41.148,57.404 -40.132,57.404 -40.132,53.34 -32.512,53.34 -32.512,44.704 -32.004,44.196 -32.004,41.656 -32.004,26.924 -33.02,26.416 -33.528,26.416 -34.036,26.416 -35.052,26.416 -37.846,26.416 -37.846,25.908 -37.846,22.86 -40.132,22.86 -40.132,26.162 -52.324,26.416
VCC-12 on Top Layer "VCC-12" (solid, remove dead copper, pour order 14): -44.45,53.594 -44.45,59.436 -4.826,59.436 -4.826,53.848 -5.08,53.594 -6.35,53.594 -6.35,57.658 -16.002,57.658 -16.002,53.848 -17.018,53.848 -17.018,57.404 -25.4,57.658 -25.908,24.13 -31.496,24.13 -31.496,57.15 -32.512,57.15 -32.512,54.102 -32.766,53.848 -33.528,53.848 -33.528,57.404 -43.18,57.404 -43.18,53.594 -43.18,55.118 -43.18,53.594
GND on Bottom Layer "GND" (solid, remove dead copper, pour order 22): 12.446,-33.02 12.446,81.23 -65.986,81.23 -66.19,81.026 -66.19,42.672 -66.19,-32.87 -66.04,-33.02

## Keep-outs
Keep-Out Layer:
  the board outline again, w0.254

## Other copper
Top Layer:
  region net NetP2_1: -30.988,75.946 -25.654,75.946 -25.654,77.978 -16.31,77.978 -15.997,77.665 -15.997,73.914 -22.86,73.914 -30.988,73.914
  region net NetP1_1: -58.166,76.962 -58.166,77.724 -44.196,77.724 -44.196,74.676 -47.244,74.676 -49.784,74.676 -49.784,75.946 -52.07,75.946 -58.166,75.946
  region net MOTOR2+: -5.08,77.724 -5.08,75.692 -5.08,73.152 -5.08,60.96 -13.716,60.96 -13.716,74.676 -13.716,75.692 -13.716,77.216 -12.7,77.724
  region net MOTOR2-: -20.574,70.612 -31.496,70.866 -31.496,69.342 -31.496,68.58 -24.892,68.58 -24.892,60.96 -15.748,60.96 -15.748,61.468 -15.748,70.612
  region net MOTOR1-: -49.276,72.39 -58.166,72.39 -58.166,70.766 -51.816,70.766 -51.816,60.96 -43.18,60.96 -43.18,69.596 -44.196,69.596 -44.196,72.39 -46.736,72.39
  region net MOTOR1+: -32.512,77.724 -32.512,75.692 -32.512,73.152 -32.512,60.96 -41.148,60.96 -41.148,74.676 -41.656,75.692 -41.656,77.216 -40.132,77.724

## Silkscreen, mask and mechanical layers (free items; w line width, h text height)
Top Overlay:
  text "+" at -40.894,80.01 h1.52
  text "-" at -18.796,80.01 h1.52
  text "+" at -12.954,80.01 h1.52
  text "-" at -46.99,79.756 h1.52
  text "+" at -44.704,-5.08 h1.52
  text "GND +5V A15 B3" at -65.532,-5.842 h1
  text "-" at -43.434,-9.144 h1.52 r90
  text "GND +5V A0 A1" at -65.532,-12.7 h1
  text "GND" at -63.754,-14.986 h1
  text "+5V" at -60.706,-14.986 h1
  text "A14 A13 /  / B10 B11 /  / A9 A10" at -53.086,-23.622 h1